# EAGLE board lightmeter_routed_horrorstory (EAGLE 6.6.0)
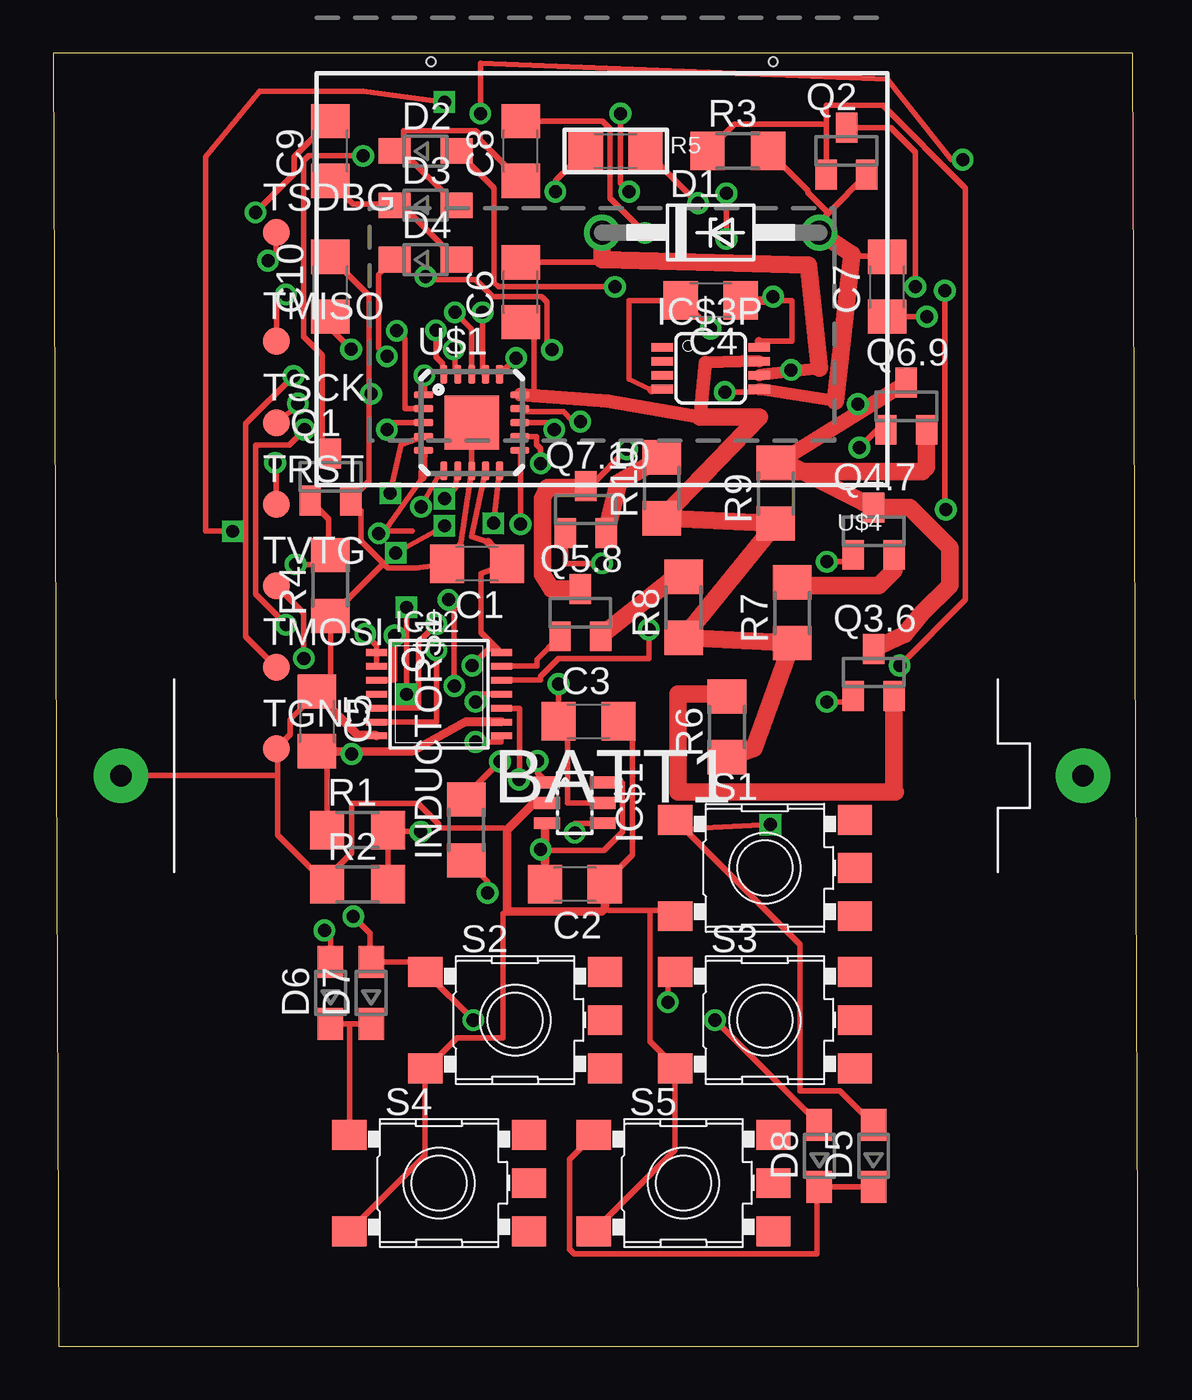
[diagram p0: board, top side]
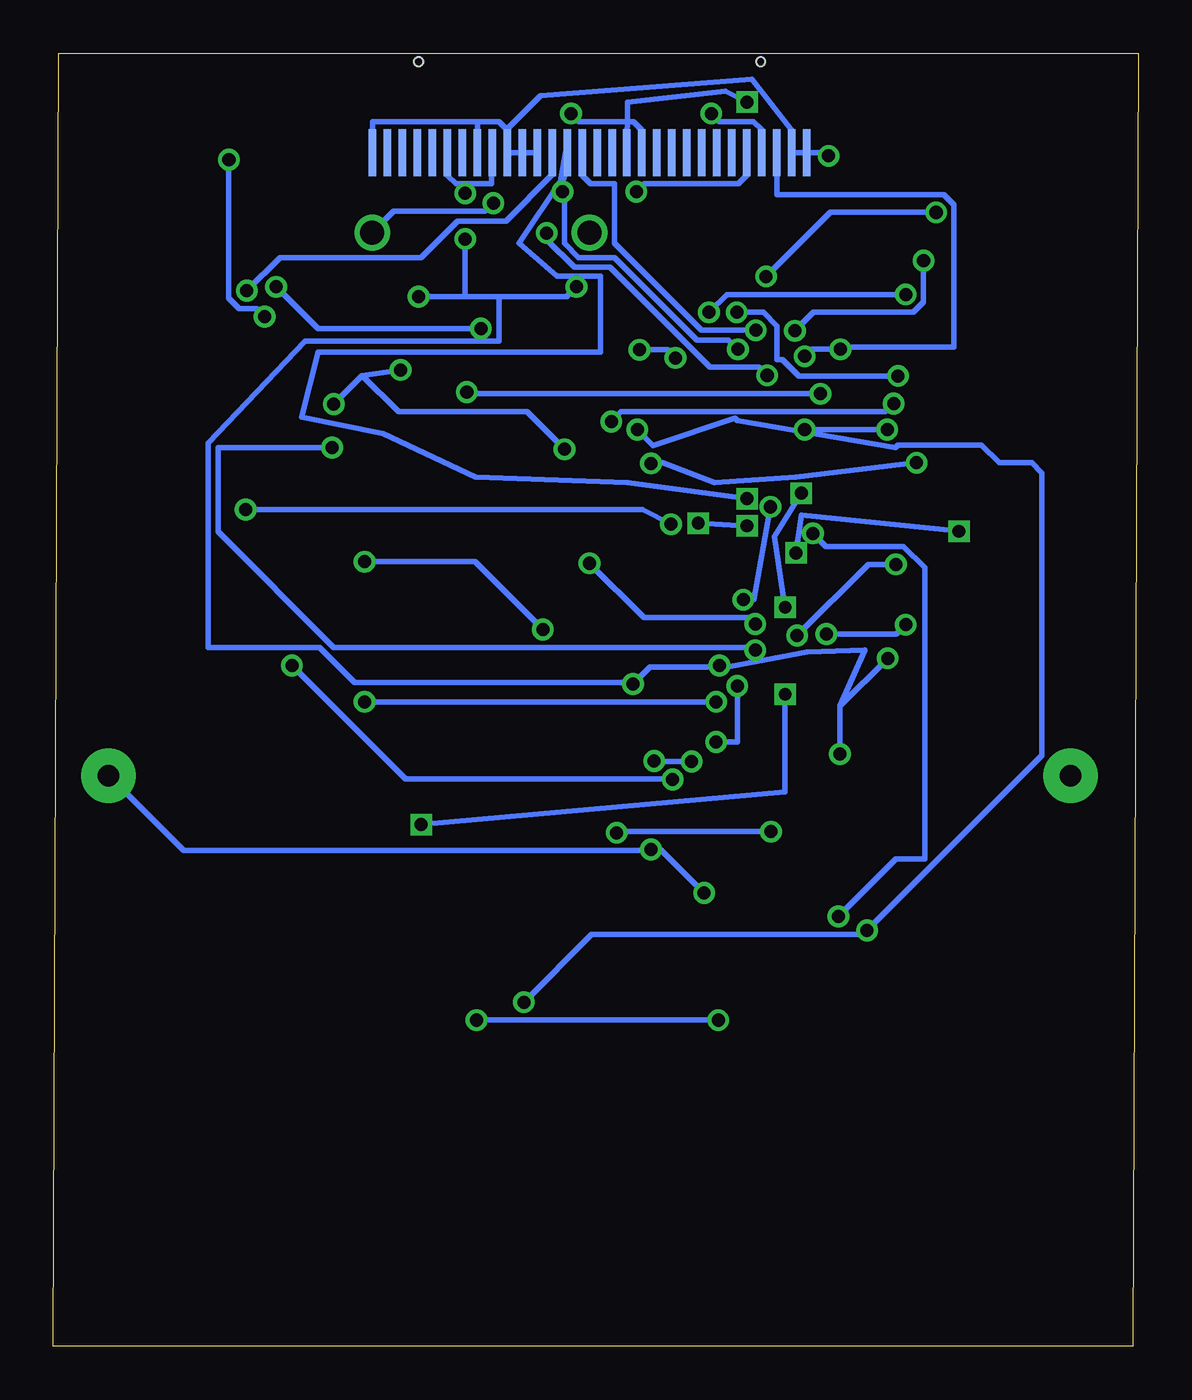
[diagram p1: board, bottom side, seen from below]

Size 50.72 x 60.44 mm. Coordinates in mm from the lower left corner, seen from the top.
Outline: 0.25,0 50.72,0 50.47,60.44 0,60.44 0.25,0
Copper layers (1*16): Top 0.035mm / dielectric 1.5mm / Bottom 0.035mm
Design rules "default": minimum track width 10mil, minimum drill 24mil, track to track 8mil, track to pad 8mil, pad to pad 8mil, via to via 8mil, smd to smd 8mil, copper to edge 40mil, drill to drill 8mil, minimum pad ring 10mil, minimum via ring 8mil, stop-mask expansion 4mil, vias tented up to drill 0mil, thermal gap 10mil

## Footprints (pad centres in the part's own frame; a part is rotated, then mirrored left to right if it is on the bottom)
12BH412 = drill 1 pad 2.54: + 22.5,0; - -22.5,0
C1206 = smd 1.6 x 1.8: 1 -1.4,0; 2 1.4,0
DO41Z10 = drill 1.118: A 5.08,0; C -5.08,0
SOD323-W = smd 1.5 x 1.2: A 1.45,0; C -1.45,0
SOT23-6L = smd 0.55 x 1.2: 1 -0.95,-1.3; 2 0,-1.3; 3 0.95,-1.3; 4 0.95,1.3; 5 0,1.3; 6 -0.95,1.3
TSSOP14 = smd 0.305 x 0.991: 1 -1.95,-2.918; 2 -1.3,-2.918; 3 -0.65,-2.918; 4 0,-2.918; 5 0.65,-2.918; 6 1.3,-2.918; 7 1.95,-2.918; 8 1.95,2.918; 9 1.3,2.918; 10 0.65,2.918; 11 0,2.918; 12 -0.65,2.918; 13 -1.3,2.918; 14 -1.95,2.918
MSOP08 = smd 0.4 x 1: 1 -0.976,-2.263; 2 -0.326,-2.263; 3 0.324,-2.263; 4 0.974,-2.263; 5 0.974,2.262; 6 0.324,2.262; 7 -0.326,2.262; 8 -0.976,2.262
R1206 = smd 1.6 x 1.803: 1 -1.422,0; 2 1.422,0
SOT23 = smd 1 x 1.4: 1 -0.95,-1.1; 2 0.95,-1.1; 3 0,1.1
1206 = smd 1.6 x 1.8: 1 -1.4,0; 2 1.4,0
SKHMPXE010 = smd 1.6 x 1.4: 1 -4.2,2.25; 2 4.2,2.25; 3 -4.2,-2.25; 4 4.2,-2.25; 5 4.2,0
B1,27 = smd 1.27 x 1.27: TP 0,0
MLF20 = smd 0.9 x 0.35: 1 -2.25,1.3; 2 -2.25,0.65; 3 -2.25,0; 4 -2.25,-0.65; 5 -2.25,-1.3; 11 2.25,-1.3; 12 2.25,-0.65; 13 2.25,0; 14 2.25,0.65; 15 2.25,1.3 | smd 0.35 x 0.9: 6 -1.3,-2.25; 7 -0.65,-2.25; 8 0,-2.25; 9 0.65,-2.25; 10 1.3,-2.25; 16 1.3,2.25; 17 0.65,2.25; 18 0,2.25; 19 -0.65,2.25; 20 -1.3,2.25 | smd 2.54 x 2.54: GND 0,0
UG-2864HSWEG01_0.96IN_WRAPAROUND = smd 0.35 x 2.2 bottom: 1 -10.15,-1.2; 2 -9.45,-1.2; 3 -8.75,-1.2; 4 -8.05,-1.2; 5 -7.35,-1.2; 6 -6.65,-1.2; 7 -5.95,-1.2; 8 -5.25,-1.2; 9 -4.55,-1.2; 10 -3.85,-1.2; 11 -3.15,-1.2; 12 -2.45,-1.2; 13 -1.75,-1.2; 14 -1.05,-1.2; 15 -0.35,-1.2; 16 0.35,-1.2; 17 1.05,-1.2; 18 1.75,-1.2; 19 2.45,-1.2; 20 3.15,-1.2; 21 3.85,-1.2; 22 4.55,-1.2; 23 5.25,-1.2; 24 5.95,-1.2; 25 6.65,-1.2; 26 7.35,-1.2; 27 8.05,-1.2; 28 8.75,-1.2; 29 9.45,-1.2; 30 10.15,-1.2 | hole 0.4: -8,-5.45; 8,-5.45

## Placement (x,y rotation side)
BATT1  AAA  [12BH412]  25.65,26.67 0 top
C1  µ1  [C1206]  19.81,36.58 180 top
C2  4µ7  [C1206]  24.38,21.59 180 top
C3  4µ7  [C1206]  25.02,29.21 0 top
C4  µ1  [C1206]  30.73,48.9 180 top
C5  µ1  [C1206]  12.32,29.21 270 top
C6  4µ7  [C1206]  21.84,49.28 90 top
C7  2µ2  [C1206]  38.99,49.53 90 top
C8  2µ  [C1206]  21.84,55.88 90 top
C9  2µ  [C1206]  12.95,55.88 90 top
C10  µ1  [C1206]  12.95,49.53 90 top
D1  1N4728  [DO41Z10]  30.73,52.07 0 top
D2  [SOD323-W]  17.4,55.88 0 top
D3  [SOD323-W]  17.4,53.34 0 top
D4  [SOD323-W]  17.4,50.8 0 top
D5  [SOD323-W]  38.35,8.89 90 top
D6  [SOD323-W]  12.95,16.51 90 top
D7  [SOD323-W]  14.86,16.51 90 top
D8  [SOD323-W]  35.81,8.89 90 top
IC$1  TI-TLV61220  [SOT23-6L]  24.38,25.4 270 top
IC$2  SN74HC164TSSOP-14  [TSSOP14]  18.03,30.48 270 top
IC$3P  AD8542RM  [MSOP08]  30.73,45.72 270 top
INDUCTOR$1  4.7µH  [R1206]  19.3,24.13 90 top
Q1  BSS123  [SOT23]  12.95,40.64 0 top
Q2  BSS123  [SOT23]  37.08,55.88 0 top
Q3.6  BSS123  [SOT23]  38.35,31.5 0 top
Q4.7  BSS123  [SOT23]  38.35,38.1 0 top
Q5.8  BSS123  [SOT23]  24.64,34.29 0 top
Q6.9  BSS123  [SOT23]  39.88,43.94 0 top
Q7.10  BSS123  [SOT23]  24.89,39.12 0 top
R1  1M  [R1206]  14.22,24.13 0 top
R2  220k  [R1206]  14.22,21.59 0 top
R3  10k  [R1206]  32,55.88 0 top
R4  10k  [R1206]  12.95,35.56 90 top
R5  530k  [1206]  26.29,55.88 0 top
R6  1k  [R1206]  31.5,28.96 90 top
R7  22k  [R1206]  34.54,34.29 90 top
R8  330k  [R1206]  29.46,34.54 90 top
R9  1M  [R1206]  33.78,39.88 90 top
R10  3.3M  [R1206]  28.45,40.13 90 top
S1  SKHMPSE010  [SKHMPXE010]  33.27,22.35 0 top
S2  SKHMPSE010  [SKHMPXE010]  21.59,15.24 0 top
S3  SKHMPSE010  [SKHMPXE010]  33.27,15.24 0 top
S4  SKHMPSE010  [SKHMPXE010]  18.03,7.62 0 top
S5  SKHMPSE010  [SKHMPXE010]  29.46,7.62 0 top
TGND  TPB1,27  [B1,27]  10.41,27.94 0 top
TMISO  TPB1,27  [B1,27]  10.41,46.99 0 top
TMOSI  TPB1,27  [B1,27]  10.41,31.75 0 top
TRST  TPB1,27  [B1,27]  10.41,39.37 0 top
TSCK  TPB1,27  [B1,27]  10.41,43.18 0 top
TSDBG  TPB1,27  [B1,27]  10.41,52.07 0 top
TVTG  TPB1,27  [B1,27]  10.41,35.56 0 top
U$1  ATTINY1634MLF20  [MLF20]  19.56,43.18 0 top
U$4  [UG-2864HSWEG01_0.96IN_WRAPAROUND]  25.65,54.61 180 top

## Library data of the parts
BATT1 = adafruit
C1-C10 = rcl
D1 = diode
D2-D8 = diode2
IC$1 = custom
IC$2 = lightmeter
IC$3P = analog-devices; MPN: AD8542ARZ; OC_FARNELL: 1464965; OC_NEWARK: 19M0965
INDUCTOR$1 R1-R4 R6-R10 = resistor
Q1 Q2 Q3.6 Q4.7 Q5.8 Q6.9 Q7.10 = transistor-small-signal
R5 U$4 = microbuilder
S1-S5 = switch
TGND TMISO TMOSI TRST TSCK TSDBG TVTG = testpad
U$1 = attiny1634

## Nets
AVRMISO: TMISO.TP U$1.17
AVRMOSI: TMOSI.TP U$1.18
AVRRST: TRST.TP U$1.12
AVRSCK: TSCK.TP U$1.14
CPCLK1: C8.2 U$1.1
CPCLK2: C9.2 U$1.16
CPOUT: C10.1 D4.C U$4.28
GND: BATT1.- C1.2 C2.1 C3.2 C5.1 C7.2 C10.2 D1.A IC$1.2 IC$2.7 IC$3P.5 Q1.2 Q2.2 R2.1 R3.2 R4.1 R5.2 S1.3 S2.3 S3.3 S4.3 S5.3 TGND.TP U$1.8 U$1.GND
N$1: IC$1.1 INDUCTOR$1.2
N$2: C6.2 D1.C IC$3P.6 Q3.6.3 Q4.7.3 Q5.8.3 Q6.9.3 Q7.10.3
N$3: Q5.8.2 R8.2
N$4: Q6.9.2 R9.2
N$5: Q3.6.2 R6.2
N$6: C4.2 IC$3P.4 Q2.3
N$7: D6.C D7.C S4.1
N$8: D5.C D8.C S5.1
N$9: Q7.10.2 R10.2
N$10: IC$1.4 R1.2 R2.2
N$16: C8.1 D2.C D3.A
N$17: C9.1 D3.C D4.A
N$19: R5.1 U$4.26
N$23: TSDBG.TP U$1.2
N$25: C7.1 U$4.27
OAOUT: C6.1 IC$3P.7 R6.1 R7.1 R8.1 R9.1 R10.1 U$1.15
OAPWR: IC$2.10 Q2.1 R3.1
PBI$1: D5.A S1.1 U$1.4
PBI$2: D7.A D8.A S2.1 U$1.5
PBI$3: D6.A S3.1 U$1.13
SCRCLK: U$1.10 U$4.18
SCRCS: U$1.11 U$4.13
SCRDAT: U$1.19 U$4.19
SCRDC: U$1.20 U$4.15
SCRGRND: Q1.3 U$4.1 U$4.8 U$4.10 U$4.11 U$4.12 U$4.29 U$4.30
SCRPWR: IC$2.3 Q1.1 R4.2
SCRRES: U$1.7 U$4.14
SRA: IC$2.1 IC$2.2 U$1.3
SRCLK: IC$2.8 U$1.6
STG$1: IC$2.5 Q7.10.1
STG$2: IC$2.6 Q6.9.1
STG$3: IC$2.13 Q5.8.1
STG$4: IC$2.12 Q4.7.1
STG$5: IC$2.11 Q3.6.1
VCC: BATT1.+ C2.2 IC$1.3 IC$1.6 INDUCTOR$1.1
VREG: C1.1 C3.1 C4.1 C5.2 D2.A IC$1.5 IC$2.9 IC$2.14 IC$3P.8 R1.1 TVTG.TP U$1.9 U$4.6 U$4.9
X: Q4.7.2 R7.2

## Tracks (layer width: path | path; a pad name or v marks a point on that pad's centre or on a via)
AVRMISO  (via drill 0.61)
  Top 0.254: v20.07,48.34 20.07,45.57 20.19,45.44 U$1.17 | v10.87,49.17 10.44,48.74 10.44,47.01 TMISO.TP
  Bottom 0.254: v20.07,48.34 19.23,49.17 v10.87,49.17
AVRMOSI  (via drill 0.61)
  Top 0.254: U$1.18 19.56,47.55 v18.77,48.34 | v11.23,45.36 8.99,43.13 8.99,33.17 TMOSI.TP
  Bottom 0.254: v18.77,48.34 17.53,48.34 16.89,47.7 16.89,46.13 16.64,46.13 15.88,45.36 v11.23,45.36
AVRRST  (via drill 0.61)
  Top 0.254: v22.78,41.27 22.78,41.96 22.58,42.16 22.58,42.52 21.82,42.52 U$1.12 | v10.36,41.3 10.41,40.84 TRST.TP
  Bottom 0.254: v22.78,41.27 22.25,41.3 19.81,40.39 16,40.64 v10.36,41.3
AVRSCK  (via drill 0.61)
  Top 0.254: v24.64,43.23 24.31,43.23 23.85,43.69 22.15,43.69 22.02,43.82 21.82,43.82 U$1.14 | v11.43,44.07 10.54,43.18 TSCK.TP
  Bottom 0.254: v24.64,43.23 24.18,43.69 11.81,43.69 v11.43,44.07
CPCLK1  (via drill 0.61)
  Top 0.254: v17.35,45.39 17.35,44.53 17.32,44.5 U$1.1 | v27.66,52.04 26.04,53.67 26.04,56.92 25.68,57.28 C8.2
  Bottom 0.254: v17.35,45.39 17.73,45.77 20.02,45.77 24.69,50.44 26.37,50.44 27.66,51.74 v27.66,52.04
CPCLK2  (via drill 0.61)
  Top 0.254: v21.64,46.2 20.88,45.44 U$1.16 | v23.32,46.58 23.09,46.81 23.09,48.82 22.84,49.07 20.52,49.07 19.74,49.86 17.4,49.86 v17.4,50.01 | v9.45,53.01 11.25,54.81 11.25,55.63 12.9,57.28 C9.2
  Bottom 0.254: v21.64,46.2 22.02,46.58 v23.32,46.58 | v17.4,50.01 14.4,53.01 v9.45,53.01
CPOUT  (via drill 0.61)
  Top 0.254: v15.6,46.28 15.22,46.66 15.22,50.09 15.93,50.8 D4.C | v13.92,46.61 12.95,47.57 C10.1
  Bottom 0.254: v15.6,46.28 15.27,46.61 v13.92,46.61 13.84,46.71 8.61,46.71 8.61,53.37 9.09,53.85 16.89,53.85 16.89,55.8 U$4.28
GND  (via drill 0.61)
  Top 0.254: S5.3 25.27,5.38 29.06,9.17 29.06,12.98 S3.3 29.03,13.11 27.89,14.25 27.89,20.37 | S4.3 13.84,5.38 17.37,8.91 17.37,12.98 S2.3 17.5,13.03 18.87,14.4 21.03,14.4 21.03,20.22 21.21,20.32 | 22.48,25.4 IC$1.2 | 27.89,20.37 29.06,20.37 29.06,20.12 S1.3 | 27.89,20.37 25.98,20.37 25.78,20.45 | C3.2 26.44,29.21 27.08,28.58 27.08,22.96 25.88,21.77 C2.1 | R2.1 10.49,23.9 10.49,26.67 | 10.49,26.67 10.49,27.84 TGND.TP 11.07,28.6 11.07,29.29 12.22,30.43 C5.1 12.95,30.81 R4.1 13.06,34.21 15.43,36.59 | R2.1 | 10.49,26.67 BATT1.- | 36.23,52.97 35.92,52.65 35.92,52.48 D1.A | 36.23,52.97 38.02,54.76 Q2.2 | v30.15,53.44 27.71,55.88 R5.2 | C7.2 38.99,50.95 37.74,50.95 37.34,51.05 | R3.2 35.28,54.03 35.28,53.92 36.23,52.97 | R3.2 | 15.43,36.59 15.65,36.37 16.94,36.37 C1.2 19.05,37.59 U$1.8 U$1.GND | 15.43,36.59 14.38,37.64 14.38,39.06 13.92,39.52 Q1.2 13.97,39.65 14.76,40.44 14.76,44.53 | 14.76,44.53 14.76,49.12 C10.2 | v31.39,44.6 32.74,44.6 IC$3P.5 | v14.86,44.53 14.76,44.53 | 21.21,24.13 21.03,24.23 18.01,24.23 18.01,24.41 17.04,25.38 13.95,25.38 13.95,23.06 12.73,21.84 R2.1
  Top 0.406: C5.1 12.95,30.61 12.95,29.84 14.22,28.58 15.07,28.58 IC$2.7 | C2.1 25.78,20.45 25.65,20.32 21.21,20.32 21.21,24.13 22.48,25.4
  Top 0.559: 36.58,44.2 IC$3P.5
  Top 0.813: D1.A 37.34,51.05 36.58,44.2
  Bottom 0.254: v30.15,53.44 30.53,53.06 34.82,53.06 D1.A | v31.39,44.6 31.32,44.53 v14.86,44.53
N$1  (via drill 0.61)
  Top 0.254: v22.63,27.36 22.63,26.8 23.06,26.37 IC$1.1 | v20.88,27.33 19.3,25.76 INDUCTOR$1.2
  Bottom 0.254: v22.63,27.36 22.61,27.33 v20.88,27.33
N$2  (via drill 0.61)
  Top 0.254: C6.2 25.25,50.67 25.65,50.8 | v34.49,45.64 35.78,45.72 | v37.62,44.04 37.8,43.75 | v26.82,41.94 25.2,40.31 Q7.10.3
  Top 0.406: 24.81,40.13 Q7.10.3
  Top 0.559: 35.81,45.72 35.78,45.72 IC$3P.6
  Top 0.711: Q6.9.3 37.8,43.75 34.04,41.4
  Top 0.813: D1.C 25.65,50.8 35.31,50.55 35.81,45.72 | 34.04,41.4 Q4.7.3 40.05,39.2 41.91,37.34 41.91,35.56 40.64,34.29 39.79,33.27 Q3.6.3 | Q5.8.3 23.28,35.39 22.86,36.07 22.86,39.62 23.11,40.13 24.81,40.13
  Bottom 0.254: v37.62,44.04 36.28,45.38 | 36.28,45.38 v34.49,45.64 | v26.82,41.94 28.58,43.69 34.59,43.69 36.28,45.38
N$3
  Top 0.406: R8.2 29.21,36.07
  Top 0.813: 29.21,36.07 Q5.8.2
N$4
  Top 0.406: 40.83,41.08 40.64,40.89 | 34.19,40.89 R9.2
  Top 0.813: Q6.9.2 40.83,41.08 | 40.64,40.89 34.19,40.89
N$5
  Top 0.406: 39.3,25.97 39.37,25.91 | 31.39,30.48 R6.2
  Top 0.813: Q3.6.2 39.3,25.97 | 39.37,25.91 29.21,25.91 29.21,30.48 31.39,30.48
N$6  (via drill 0.61)
  Top 0.254: 27.96,44.7 26.92,45.21 26.92,48.9 C4.2 29.52,48.79 v30.73,47.57 | v40.31,49.53 40.31,55.83 39.17,56.97 Q2.3
  Top 0.406: 27.96,44.7 IC$3P.4
  Bottom 0.254: v40.31,49.53 38.35,47.57 v30.73,47.57
N$7
  Top 0.254: 13.84,15.06 D7.C | 13.84,15.06 D6.C | 13.84,15.06 13.84,9.88 S4.1
N$8
  Top 0.254: D5.C D8.C 35.71,7.37 35.71,4.32 24.33,4.32 24.13,4.52 24.13,8.74 25.25,9.86 S5.1
N$9
  Top 0.813: R10.2 26.42,40.39 Q7.10.2
N$10  (via drill 0.61)
  Top 0.254: v24.38,24 24.38,24.44 25.68,24.44 IC$1.4 | v17.17,24.05 15.65,24.05 R1.2 | R1.2 | R2.2 15.65,23.95 R1.2 | R2.2
  Bottom 0.254: v24.38,24 24.33,24.05 v17.17,24.05
N$16
  Top 0.254: D3.A 16.31,55.88 D2.C 16.38,55.98 16.38,56.82 19.74,56.82 19.94,56.62 19.94,56.39 C8.1
N$17
  Top 0.254: D4.A 16.31,53.34 D3.C 15.82,53.39 14.02,53.39 12.95,54.46 C9.1
N$19  (via drill 0.61)
  Top 0.254: v23.47,53.98 23.47,54.48 24.87,55.88 R5.1
  Bottom 0.254: v23.47,53.98 23.09,54.36 18.69,54.36 18.31,54.74 U$4.26
N$23  (via drill 0.61)
  Top 0.254: v16.05,47.47 16.43,47.09 16.43,43.84 U$1.2 | v10.03,50.75 10.41,51.13 TSDBG.TP
  Bottom 0.254: v16.05,47.47 15.19,48.34 10.52,48.34 10.03,48.82 v10.03,50.75
N$25  (via drill 0.61)
  Top 0.254: v40.84,48.13 C7.1 | v42.52,55.47 41.99,55.47 38.99,59.23 19.96,59.99 v19.96,57.63
  Bottom 0.254: v40.84,48.13 41.22,48.51 42.04,48.51 42.52,49 v42.52,55.47 | v19.96,57.63 19.58,57.25 17.98,57.25 17.63,56.9 17.63,55.83 U$4.27
OAOUT
  Top 0.254: C6.1 21.84,47.85 22.48,47.22 22.48,44.73 22.46,44.43 | R6.1 31.5,27.56 31.62,27.56 32,27.69
  Top 0.559: IC$3P.7 30.48,45.97
  Top 0.635: 30.48,45.97 30.23,43.43 25.91,44.2 22.46,44.43 U$1.15
  Top 0.813: 30.23,43.43 33.02,43.43 R10.1 R9.1 R8.1 R7.1 32.77,27.94 32,27.69
OAPWR  (via drill 0.61)
  Top 0.254: v21.77,26.49 21.79,26.52 21.79,29.82 IC$2.10 | v39.57,31.83 42.65,34.9 42.65,54.15 38.79,58.01 36.14,58.01 36.14,57.12 | 36.14,57.12 Q2.1 | 36.14,57.12 31.85,57.12 30.61,55.88 R3.1
  Bottom 0.254: v21.77,26.49 21.79,26.52 34.27,26.52 v39.57,31.83
PBI$1  (via drill 0.6)
  Top 0.254: 29.5,24.17 29.08,24.59 S1.1 | 29.5,24.17 34.9,18.77 34.9,11.94 36.78,11.94 38.35,10.36 D5.A | U$1.4 16.26,42.16 v15.75,39.88 | v16.51,34.54 v16.51,30.48 | v33.53,24.38 29.5,24.17
  Bottom 0.254: v15.75,39.88 17.02,37.85 v16.51,34.54 | v16.51,30.48 16.51,25.91 v33.53,24.38
PBI$2  (via drill 0.61)
  Top 0.254: 17.27,40.61 15.49,38.1 | 15.49,38.1 16.76,38.1 | v30.94,15.24 35.81,10.36 D8.A | v19.63,15.24 17.48,17.4 S2.1 17.37,17.5 17.37,17.96 D7.A 14.81,18.09 14.81,19.3 v14.02,20.09 | v15.22,38 15.32,38 15.49,38.1
  Top 0.406: U$1.5 17.27,40.61
  Bottom 0.254: v19.63,15.24 v30.94,15.24 | v15.22,38 14.61,37.39 10.97,37.39 9.98,36.4 9.98,22.78 11.33,22.78 v14.02,20.09
PBI$3  (via drill 0.61)
  Top 0.254: U$1.13 23.42,43.18 v23.42,42.85 | v12.68,19.43 12.95,19.15 D6.A | v28.73,16.08 28.73,17.15 29.06,17.48 S3.1
  Bottom 0.254: v23.42,42.85 22.68,42.11 18.85,43.38 18.74,43.28 11.35,42.01 11.23,42.14 7.34,42.14 6.5,41.3 4.98,41.3 4.5,40.82 4.5,27.61 v12.68,19.43 12.78,19.35 12.88,19.25 25.55,19.25 v28.73,16.08
SCRCLK  (via drill 0.6)
  Top 0.254: v18.29,58.17 14.48,58.67 9.65,58.67 7.11,55.63 7.11,38.1 v8.38,38.1 | U$1.10 v20.57,38.48 | v18.29,38.35 v16,37.08
  Bottom 0.254: U$4.18 23.88,58.17 19.3,58.67 v18.29,58.17 | v20.57,38.48 v18.29,38.35 | v16,37.08 15.75,38.86 v8.38,38.1
SCRCS  (via drill 0.61)
  Top 0.254: v21.84,38.43 21.84,41.83 21.82,41.86 U$1.11 | v41.73,39.12 41.68,39.17 v41.68,49.35
  Bottom 0.254: v21.84,38.43 23.19,39.12 v41.73,39.12 | v41.68,49.35 40.13,50.9 33.53,50.9 31.83,52.6 29.57,52.6 27.41,54.76 U$4.13
SCRDAT  (via drill 0.61)
  Top 0.254: v18.72,46.61 18.77,46.56 18.77,45.57 U$1.19 | v26.92,53.98 26.52,54.38 v26.52,57.63
  Bottom 0.254: v18.72,46.61 19.15,47.04 20.62,47.04 24.49,50.9 26.16,50.9 26.82,51.56 26.82,53.98 v26.92,53.98 | v26.52,57.63 26.14,57.25 23.6,57.25 23.22,56.87 23.22,55.83 U$4.19
SCRDC  (via drill 0.61)
  Top 0.254: v17.88,47.5 17.88,46.25 18.19,45.95 18.19,45.49 18.24,45.44 U$1.20
  Bottom 0.254: v17.88,47.5 20.42,47.5 24.49,51.56 24.49,54.36 25.6,54.36 25.98,54.74 25.98,55.8 U$4.15
SCRGRND  (via drill 0.61)
  Top 0.254: v14.48,55.65 11.94,55.65 11.71,55.42 11.71,47.19 12.57,46.33 12.57,42.14 12.95,41.76 Q1.3
  Bottom 0.254: U$4.12 28.12,55.8 U$4.11 28.93,55.8 29.49,55.8 U$4.10 29.54,55.93 29.54,56.9 | 30.89,57.25 30.89,55.83 U$4.8 | 30.89,57.25 29.9,57.25 29.54,56.9 | 30.89,57.25 35.79,57.25 35.79,55.83 U$4.1 | v14.48,55.65 14.63,55.8 U$4.30 15.62,55.8 16.18,55.8 U$4.29 16.23,55.93 16.23,56.9 18.06,59.23 27.94,58.47 29.44,56.97 29.54,56.9
SCRPWR  (via drill 0.61)
  Top 0.254: v15.95,33.22 15.95,31.14 15.14,31.14 IC$2.3 | v11.33,36.55 12.95,36.55 R4.2 12.88,37.08 12.88,38.66 12.01,39.52 Q1.1
  Bottom 0.254: v15.95,33.22 12.62,36.55 v11.33,36.55
SCRRES  (via drill 0.6)
  Top 0.254: v18.29,39.62 18.8,40.13 U$1.7
  Bottom 0.254: 26.92,54.61 28.96,51.56 27.18,50.04 25.15,50.04 25.15,46.48 38.35,46.48 39.12,43.43 35.31,42.67 30.99,40.64 23.88,40.39 v18.29,39.62
  Bottom 0.406: U$4.14 26.92,54.61
SRA  (via drill 0.61)
  Top 0.254: U$1.3 15.6,43.18 v15.6,42.85 | v11.73,42.85 11.02,42.14 9.45,42.14 9.45,35.15 v10.87,33.73 | v14.58,33.3 15.11,32.77 IC$2.1 15.11,32.31 15.11,31.8 IC$2.2
  Bottom 0.254: v11.73,42.85 v15.6,42.85 | v10.87,33.73 11.3,33.3 v14.58,33.3
SRCLK  (via drill 0.61)
  Top 0.254: v17.2,39.24 17.96,40.64 18.24,40.92 U$1.6 | v18.47,34.9 18.74,34.62 v18.74,30.86 | v19.74,28.24 20.93,28.24 20.93,28.52 IC$2.8
  Bottom 0.254: v17.2,39.24 17.96,34.9 v18.47,34.9 | v18.74,30.86 18.74,28.24 v19.74,28.24
STG$1  (via drill 0.61)
  Top 0.254: v17.91,33.76 17.07,32.92 17.07,29.84 15.14,29.84 IC$2.5 | v25.65,36.6 23.95,36.6 23.95,38 Q7.10.1
  Bottom 0.254: v17.91,33.76 18.21,34.06 23.11,34.06 v25.65,36.6
STG$2  (via drill 0.61)
  Top 0.254: v17.91,32.54 17.91,29.19 15.14,29.19 IC$2.6 | v37.69,42.01 38.51,42.82 38.91,42.82 Q6.9.1
  Bottom 0.254: v17.91,32.54 18.03,32.66 37.62,32.66 43.03,38.08 43.03,42.01 v37.69,42.01
STG$3
  Top 0.254: IC$2.13 20.95,31.8 22.61,31.8 22.61,32.11 23.67,33.17 Q5.8.1
STG$4  (via drill 0.61)
  Top 0.254: v27.84,33.5 27.84,32.16 23.62,32.16 22.78,31.32 22.78,31.14 IC$2.12 | v36.17,36.68 37.39,36.68 37.39,36.98 Q4.7.1
  Bottom 0.254: v27.84,33.5 31.01,36.68 v36.17,36.68
STG$5  (via drill 0.61)
  Top 0.254: IC$2.11 19.74,30.48 v19.74,30.12 | v36.17,30.12 37.39,30.12 37.39,30.38 Q3.6.1
  Bottom 0.254: v36.17,30.12 v19.74,30.12
VCC  (via drill 0.61)
  Top 0.254: 22.98,23.16 25.76,23.16 26.62,24.03 26.62,26.34 25.7,26.34 IC$1.6 | INDUCTOR$1.1 20.3,21.72 v20.3,21.18 | INDUCTOR$1.1 | v22.78,23.22 22.98,23.22
  Top 0.406: C2.2 22.98,23.16 22.98,23.22 22.98,24.35 IC$1.3
  Bottom 0.254: v20.3,21.18 22.33,23.22 v22.78,23.22 22.88,23.16 44.63,23.16 48.13,26.67 BATT1.+
VREG  (via drill 0.61)
  Top 0.254: 33,46.99 34.54,46.99 34.54,48.9 33.66,48.9 v33.66,49.07 | 20.32,37.59 19.56,37.85 U$1.9 | v26.26,49.53 20.8,49.53 20.6,49.73 20.6,54.15 18.87,55.88 D2.A | v31.47,51.76 v31.47,53.9 | IC$1.5 24.03,25.4 24.03,28.8 C3.1 23.62,29.31 v23.62,30.96 | 20.56,32.8 19.99,33.38 19.99,36.12 C1.1 | 20.56,32.8 20.93,32.44 IC$2.14 | TVTG.TP 11.71,34.27 v11.71,32.16 | v13.95,27.69 13.95,27.81 | R1.1 12.8,27.61 C5.2 | R1.1 | v19.58,31.83 20.56,32.8
  Top 0.406: C4.1 33.66,48.9 | 33,46.99 IC$3P.8 | C5.2 13.95,27.81 16.76,27.81 19.3,29.21 | 19.3,29.21 20.95,29.21 IC$2.9 19.27,29.18 19.3,29.21 | C1.1 20.32,37.59
  Bottom 0.254: 31.47,54.36 31.9,54.36 32.28,54.74 32.28,55.8 U$4.6 | 31.47,54.36 30.23,54.36 30.23,55.8 U$4.9 | v26.26,49.53 26.72,49.07 29.9,49.07 | v33.66,49.07 31.47,49.07 | 31.47,49.07 29.9,49.07 | v31.47,53.9 31.47,54.36 | 31.47,49.07 v31.47,51.76 | 13.95,29.92 v11.71,32.16 | v13.95,27.69 13.95,29.92 | 13.95,29.92 12.78,32.54 15.49,32.46 19.46,31.7 v19.58,31.83 19.69,31.75 22.84,31.75 v23.62,30.96 23.72,31.04 36.65,31.04 38.28,32.66 43.48,32.66 43.48,42.21 38.96,46.99 29.9,46.99 29.9,49.07
X
  Top 0.406: Q4.7.2 39.3,36.26 | 34.7,35.56 R7.2
  Top 0.813: 39.3,36.26 38.61,35.56 34.7,35.56